# Altium PCB ST-Link_V3_PCB.PcbDoc
Units mm, origin at the board's own origin, x right, y up, seen from the top; angles counter-clockwise.
Board outline 24 x 19 mm, 2 copper layers (Top Layer, Bottom Layer); 3 components, 7 nets, 22 pads, 32 vias.
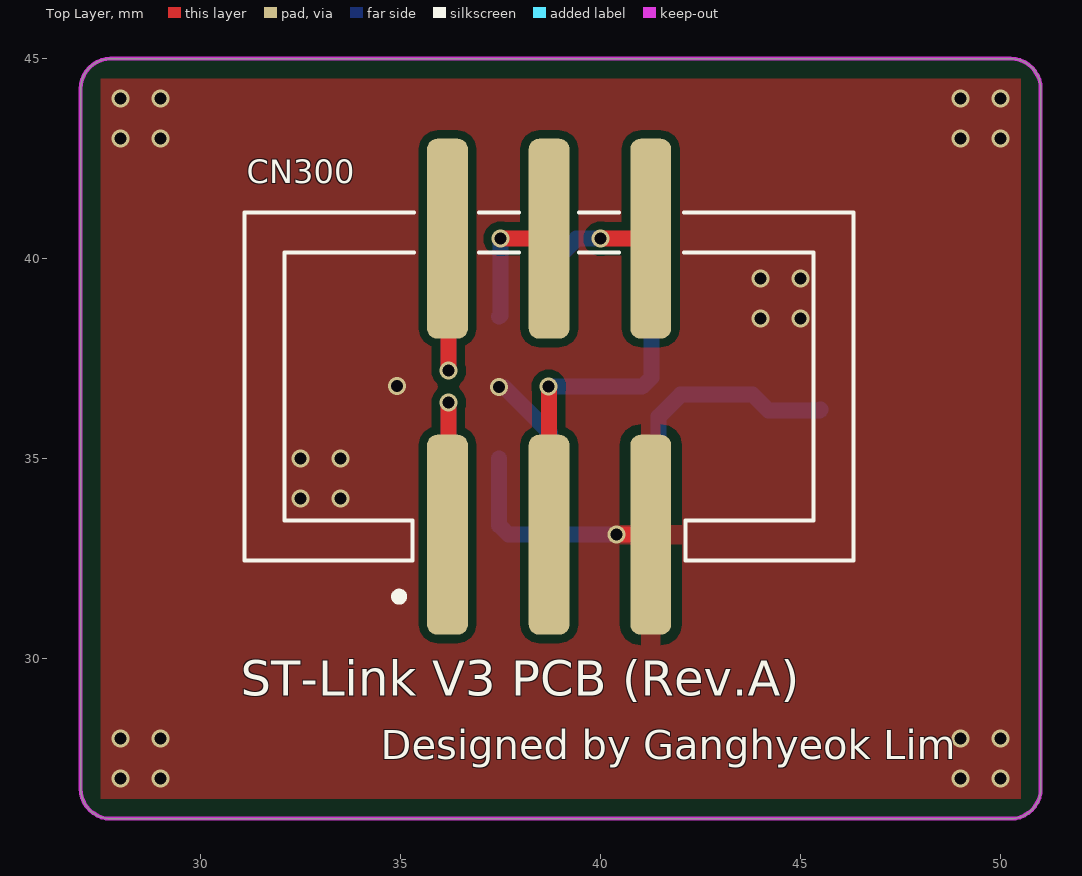
[diagram p0: Top Layer view]
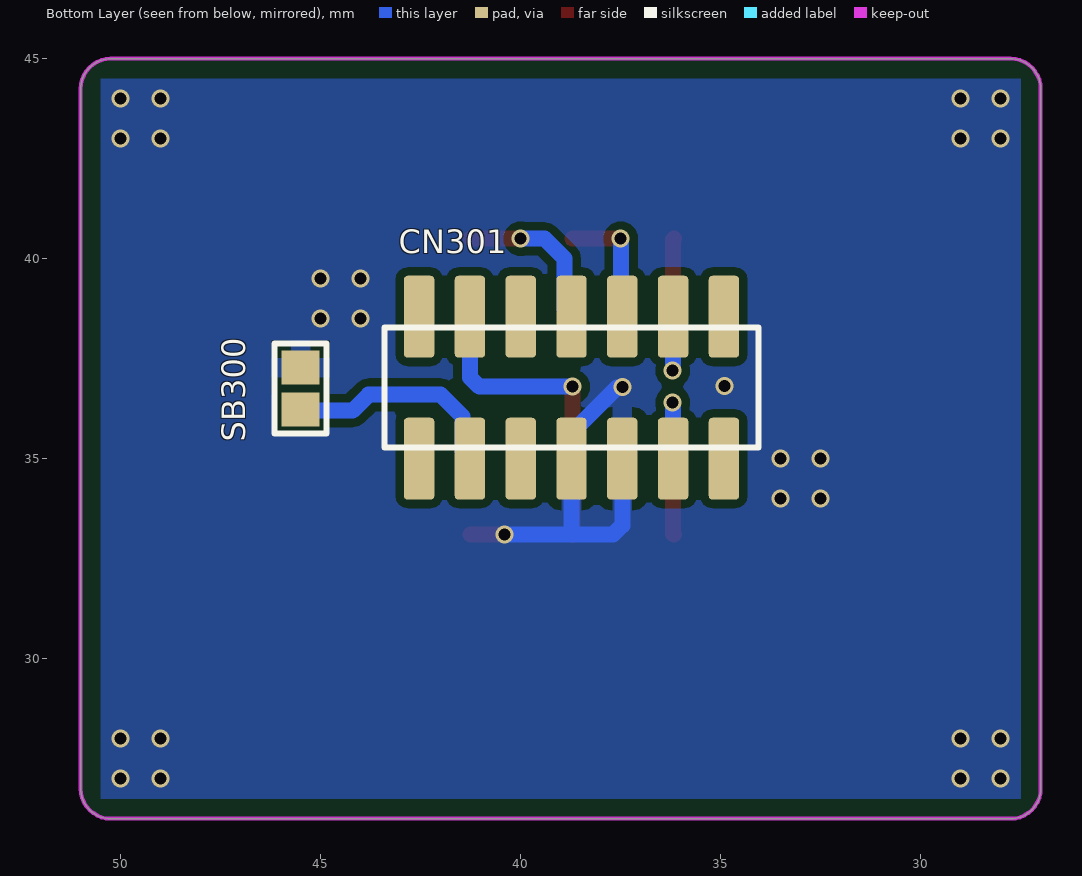
[diagram p1: Bottom Layer view, seen from below]

## Layer stack, top to bottom
Top Solder: solder mask 0.0102, Solder Resist, Dk 3.5
Top Layer: signal copper 0.0356
Dielectric 1: dielectric 0.32, FR-4, Dk 4.8
Bottom Layer: signal copper 0.0356
Bottom Solder: solder mask 0.0102, Solder Resist, Dk 3.5

## Board outline
27,26.75 27,44.25 cw(c27.75,44.25) 27.75,45 50.25,45 cw(c50.25,44.25) 51,44.25 51,26.75 cw(c50.25,26.75) 50.25,26 27.75,26 cw(c27.75,26.75)

## Design rules (kind name [scope] priority, off if disabled: settings)
BoardOutlineClearance [All] p1: gap=0.2 ignorepadtopadclearanceinfootprint=FALSE except(0.4: Arc-SplitBarrior Arc-SplitContinuation Track-SplitBarrior Track-SplitContinuation SMDPad-SplitBarrior SMDPad-SplitContinuation THPad-SplitBarrior THPad-SplitContinuation Via-SplitBarrior Via-SplitContinuation Fill-SplitBarrior Fill-SplitContinuation Poly-SplitBarrior Poly-SplitContinuation Region-SplitBarrior Region-SplitContinuation Text-SplitBarrior Text-SplitContinuation)
Clearance "Clearance Bottom Layer" [OnLayer('Bottom Layer')] p1: gap=0.203 ignorepadtopadclearanceinfootprint=TRUE except(0.254: Arc-Text Track-Text SMDPad-Text THPad-Text Via-Text Fill-Text Poly-Text Region-Text Text-Text)
Clearance "Clearance Top Layer" [OnLayer('Top Layer')] p2: gap=0.203 ignorepadtopadclearanceinfootprint=TRUE except(0.254: Arc-Text Track-Text SMDPad-Text THPad-Text Via-Text Fill-Text Poly-Text Region-Text Text-Text)
Clearance [All] p3: gap=0.2 ignorepadtopadclearanceinfootprint=FALSE except(0.089: Arc-Arc Arc-Track Arc-SMDPad Track-Track Track-SMDPad SMDPad-SMDPad; 0.127: Arc-Via Track-Via SMDPad-Via THPad-Via Via-Via; 0.254: Arc-Text Track-Text SMDPad-Text THPad-Text Via-Text Fill-Text Poly-Text Region-Text Text-Text)
HoleSize [All] p1: absolutevalues=TRUE maxlimit=6.3 minlimit=0.2 maxpercent=80.000 minpercent=20.000
MinimumAnnularRing [All] p1: minimumring=0.076
MinimumSolderMaskSliver [All] p1: minsoldermaskwidth=0.1
PolygonConnect PolygonConnect_1 [All] p1: thpad.connectstyle=Relief thpad.reliefconductorwidth=0.508 thpad.reliefentries=4 thpad.polygonreliefangle="90 Angle" thpad.airgapwidth=0.254 smdpad.connectstyle=Relief smdpad.reliefconductorwidth=0.508 smdpad.reliefentries=4 smdpad.polygonreliefangle="90 Angle" smdpad.airgapwidth=0.254 via.connectstyle=Direct via.reliefconductorwidth=0.508 via.reliefentries=4 via.polygonreliefangle="90 Angle" via.airgapwidth=0.254
RoutingCorners [All] p1: cornerstyle=Round minsetback=2.54 maxsetback=2.54
RoutingVias [All] p1: holewidth=0.3 width=0.45 viastyle="Through Hole" minholewidth=0.15 minwidth=0.3 maxholewidth=1 maxwidth=2
SilkToSilkClearance [All] p1: silktosilkclearance=0.1
SilkToSolderMaskClearance [IsPad] p1: minsilkscreentomaskgap=0.1 clearancetoexposedcopper=TRUE
SolderMaskExpansion [All] p1: expansion=0.102 istentingtop=FALSE
Width [All] p1: maxlimit=2 minlimit=0.1 preferedwidth=0.2
25 further rules are at their usual default settings.

## Components (designator, comment, footprint, x,y, rotation, side; value= is the part's Value field where it differs from the comment)
CN300 "3FB-06P-SMD" CON_BOX_HEADER_DUAL_2x3PIN(2.54MM) 38.71,36.8 r0 top
CN301 "20021321-00014T4LF" CON_RCPT_DUAL_2x7PIN(1.27MM) 38.73,36.775 r0 bottom
SB300 "SB" "SB (Solder-Bridge)" 45.5,36.75 r270 bottom

## Footprints (in the part's own frame and the unit in brackets; to place one, negate y for a bottom-side part, rotate by r counter-clockwise, add the part's x,y. Pads: shape width x height; smd on the part's side, far side on the other; paste and mask are expansions set on the pad)
CON_BOX_HEADER_DUAL_2x3PIN(2.54MM) [mm]
  rrect50% 1.02x5 smd mask+0: 1(-2.54,-3.7) 2(-2.54,3.7) 3(0,-3.7) 4(0,3.7) 5(2.54,-3.7) 6(2.54,3.7)
  silkscreen extent -7.61,-5.3 7.61,4.35, body extent -7.62,-4.75 7.62,4.75, height 10.52
CON_RCPT_DUAL_2x7PIN(1.27MM) [mm]
  rrect25% 0.76x2.05 smd mask+0: 1(-3.81,-1.775) 2(-3.81,1.775) 3(-2.54,-1.775) 4(-2.54,1.775) 5(-1.27,-1.775) 6(-1.27,1.775) 7(0,-1.775) 8(0,1.775) 9(1.27,-1.775) 10(1.27,1.775) 11(2.54,-1.775) 12(2.54,1.775) 13(3.81,-1.775) 14(3.81,1.775)
  silkscreen extent -4.68,-1.5 4.68,1.5, body extent -4.68,-2.25 4.68,2.25, height 4.51
"SB (Solder-Bridge)" [mm] "SB (Solder-Bridge)"
  rect 0.85x0.95 smd mask+0.038: 1(-0.525,0) 2(0.525,0)
  silkscreen extent -1.12,-0.65 1.12,0.65

## Part data
CN300: library part CON_BOX_HEADER_DUAL_2x3PIN(2.54MM), "BOX HEADER SMD / 2.54mm pitch / with IDC Connector"
CN301: library part CON_RCPT_DUAL_2x7PIN(1.27MM), "14 Position Receptacle Connector 0.050\" (1.27mm) Surface Mount Gold", JLCPCB Part Type="Extended Part", LCSC Part #=C5412490
SB300: library part SB_Solder-Bridge, "SB_Solder-Bridge"

## Via types
v1: diameter 0.45, hole 0.3, Top Layer to Bottom Layer, tented both sides, 32 vias

## Nets (pads, with @x,y where several pads share a name; then routed paths per layer and width w, separated by ;. In a path a pad name is that pad's centre, name@x,y a point inside that pad or via, vN(x,y) a via of type N, cw(c..) or ccw(c..) an arc to the next point about the centre after c; other vN are vias at no path point)
GND: CN300.5 CN301.6 CN301.8 SB300.1 | length 9.9
  Top Layer w0.4: v1(40.4,33.1) CN300.5
  Bottom Layer w0.4: v1(37.452,36.796) 37.461,36.786 37.589,36.786 38.73,35.645 CN301.8 38.73,33.13 38.7,33.1 ; CN301.6 37.46,33.334 37.694,33.1 38.7,33.1 ; v1(40.4,33.1) 38.7,33.1
  other v1: 28,27 29,27 49,27 50,27 28,28 29,28 49,28 50,28 32.5,34 33.5,34 32.5,35 33.5,35 34.908,36.813 44,38.5 45,38.5 44,39.5 45,39.5 28,43 29,43 49,43 50,43 28,44 29,44 49,44 50,44
GND_DETECT: CN301.12 SB300.2 | length 5.6
  Bottom Layer w0.4: CN301.12 41.45,35.18 41.45,36.05 42,36.6 43.8,36.6 44.2,36.2 45.475,36.2 SB300.2
T_NRST: CN300.3 CN301.11 | length 7.9
  Top Layer w0.4: v1(38.7,36.8) 38.705,36.795 38.705,33.105 CN300.3
  Bottom Layer w0.4: v1(38.7,36.8) 41.036,36.8 41.27,37.034 CN301.11
T_P3.3VS: CN300.1 CN301.4 | length 4.7
  Top Layer w0.4: CN300.1 36.19,33.12 36.19,36.39 v1(36.2,36.4)
  Bottom Layer w0.4: CN301.4 36.195,35.005 36.195,36.395 v1(36.2,36.4)
T_SWCLK: CN300.4 CN301.5 | length 3.2
  Top Layer w0.4: v1(37.5,40.5) CN300.4
  Bottom Layer w0.4: CN301.5 37.49,38.58 37.49,40.49 v1(37.5,40.5)
T_SWDIO: CN300.2 CN301.3 | length 4.7
  Top Layer w0.4: CN300.2 36.19,40.48 36.19,37.21 v1(36.2,37.2)
  Bottom Layer w0.4: CN301.3 36.195,38.545 36.195,37.205 v1(36.2,37.2)
T_SWO: CN300.6 CN301.7 | length 4.1
  Top Layer w0.4: v1(40,40.5) CN300.6
  Bottom Layer w0.4: CN301.7 38.91,38.73 38.91,40.01 39.4,40.5 v1(40,40.5)
pads on no net: CN301.1 CN301.2 CN301.9 CN301.10 CN301.13 CN301.14

## Polygon pours and split planes (outlines as drawn)
GND on Top Layer "DGND_Top_Layer" (solid, remove dead copper, pour order 0): 27.5,44.5 27.5,26.5 50.5,26.5 50.5,44.5
GND on Bottom Layer "DGND_Top_Layer" (solid, remove dead copper, pour order 1): 27.5,44.5 27.5,26.5 50.5,26.5 50.5,44.5

## Keep-outs
Keep-Out Layer:
  the board outline again, w0.1

## Silkscreen, mask and mechanical layers (free items; w line width, h text height)
Top Overlay:
  text "ST-Link V3 PCB (Rev.A)" at 30.997,28.782 h1.5
  text "Designed by Ganghyeok Lim" at 34.5,27.236 h1.25